# Altium PCB 新主控制.PcbDoc (part 1 of 3)
Units mil, origin at the board's own origin, x right, y up, seen from the top; angles counter-clockwise.
Board outline 9070 x 4900 mil, 2 copper layers (Top Layer, Bottom Layer); 275 components, 202 nets, 862 pads, 116 vias.
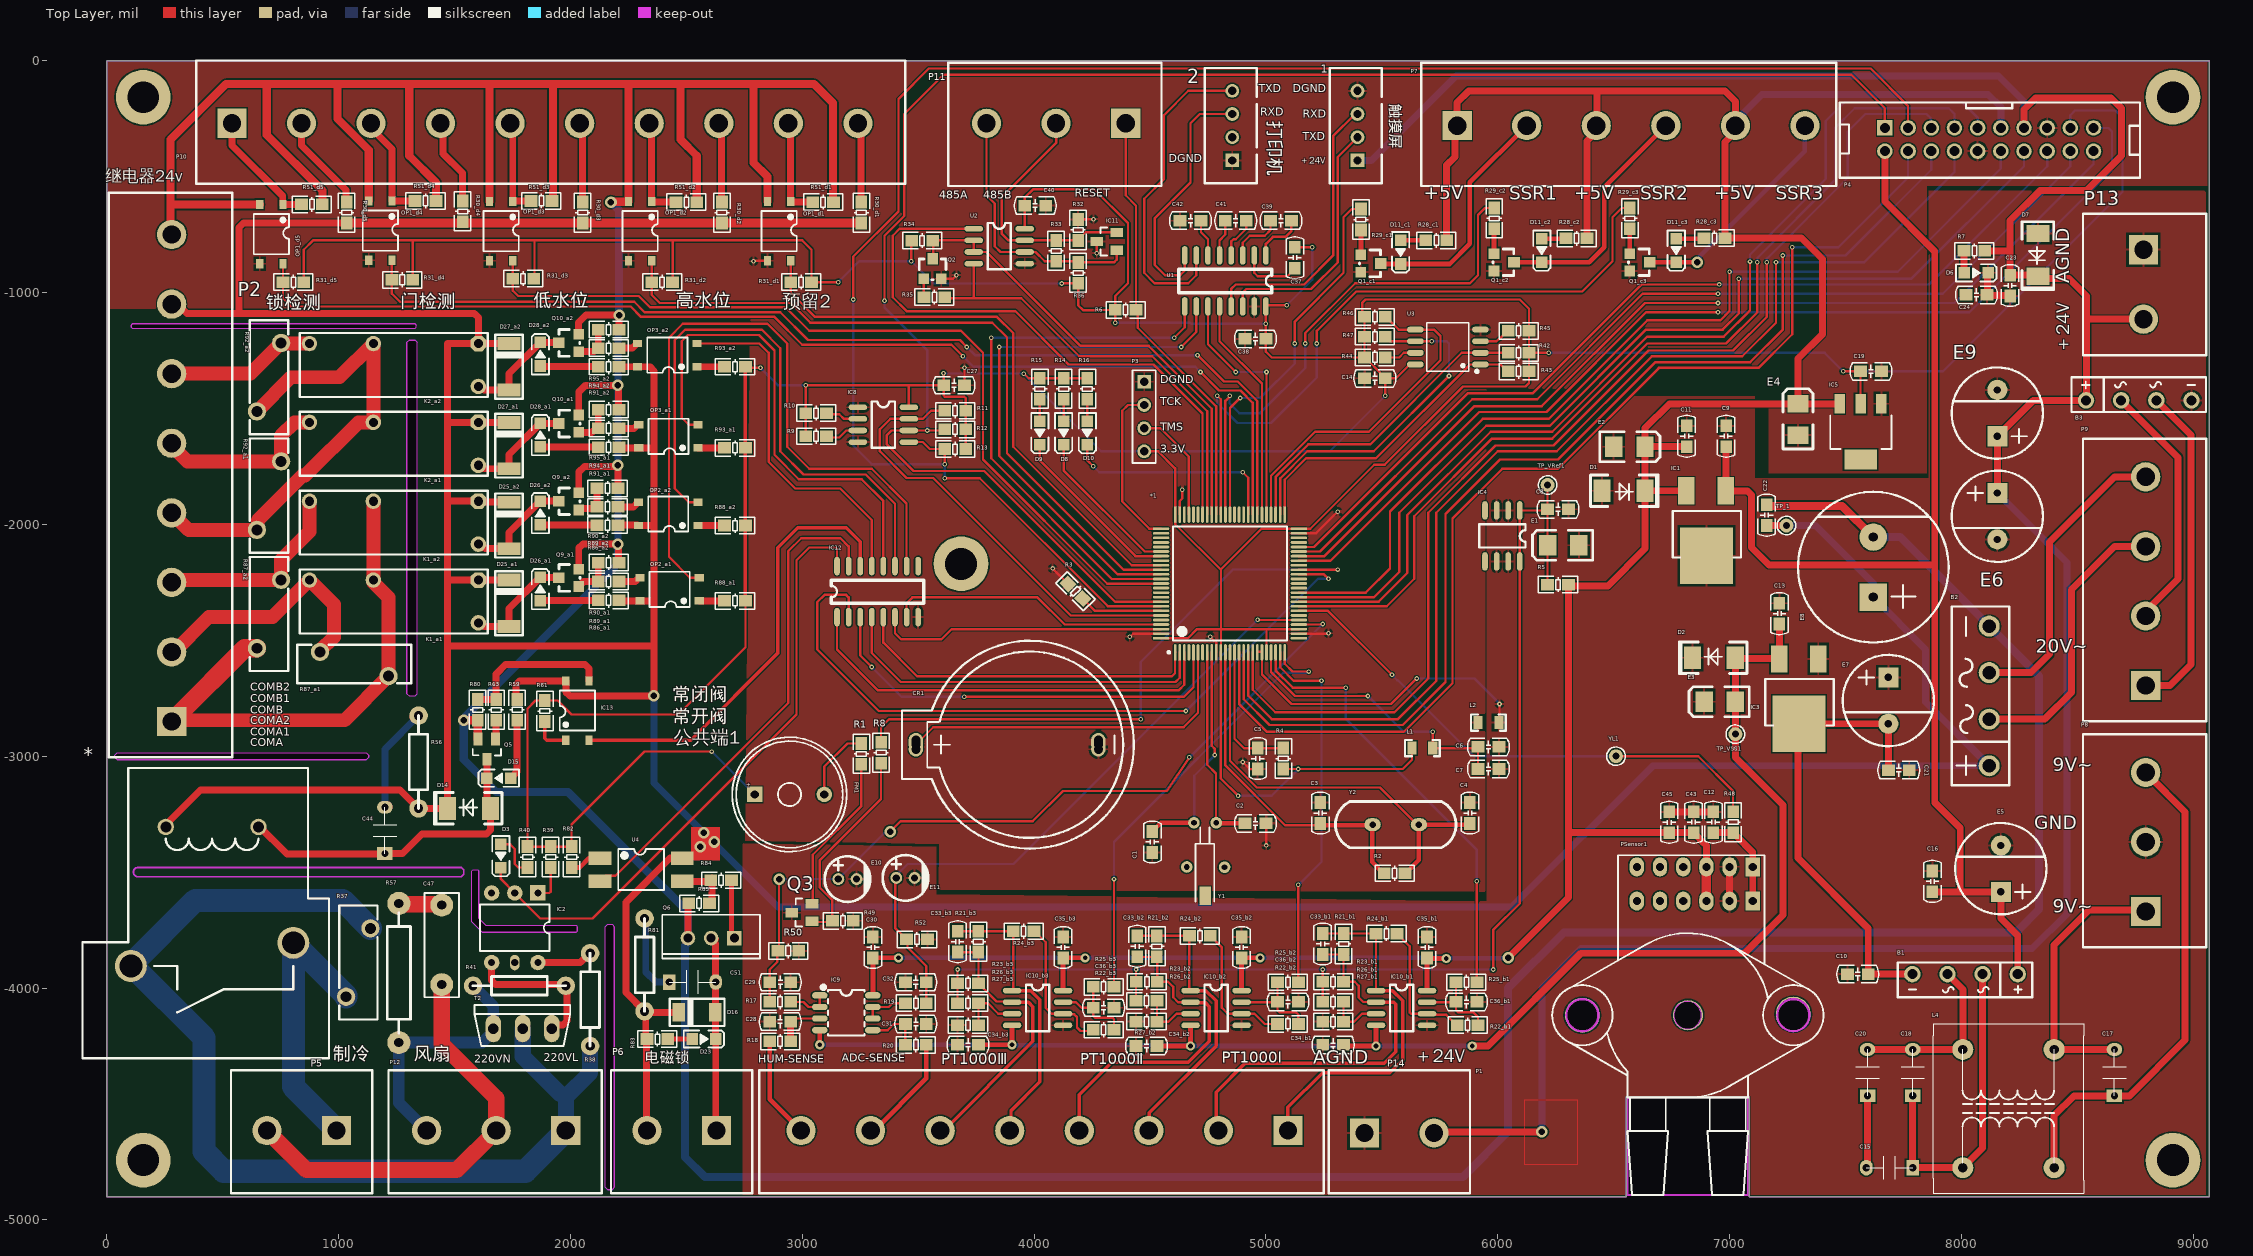
[diagram p0: Top Layer view]
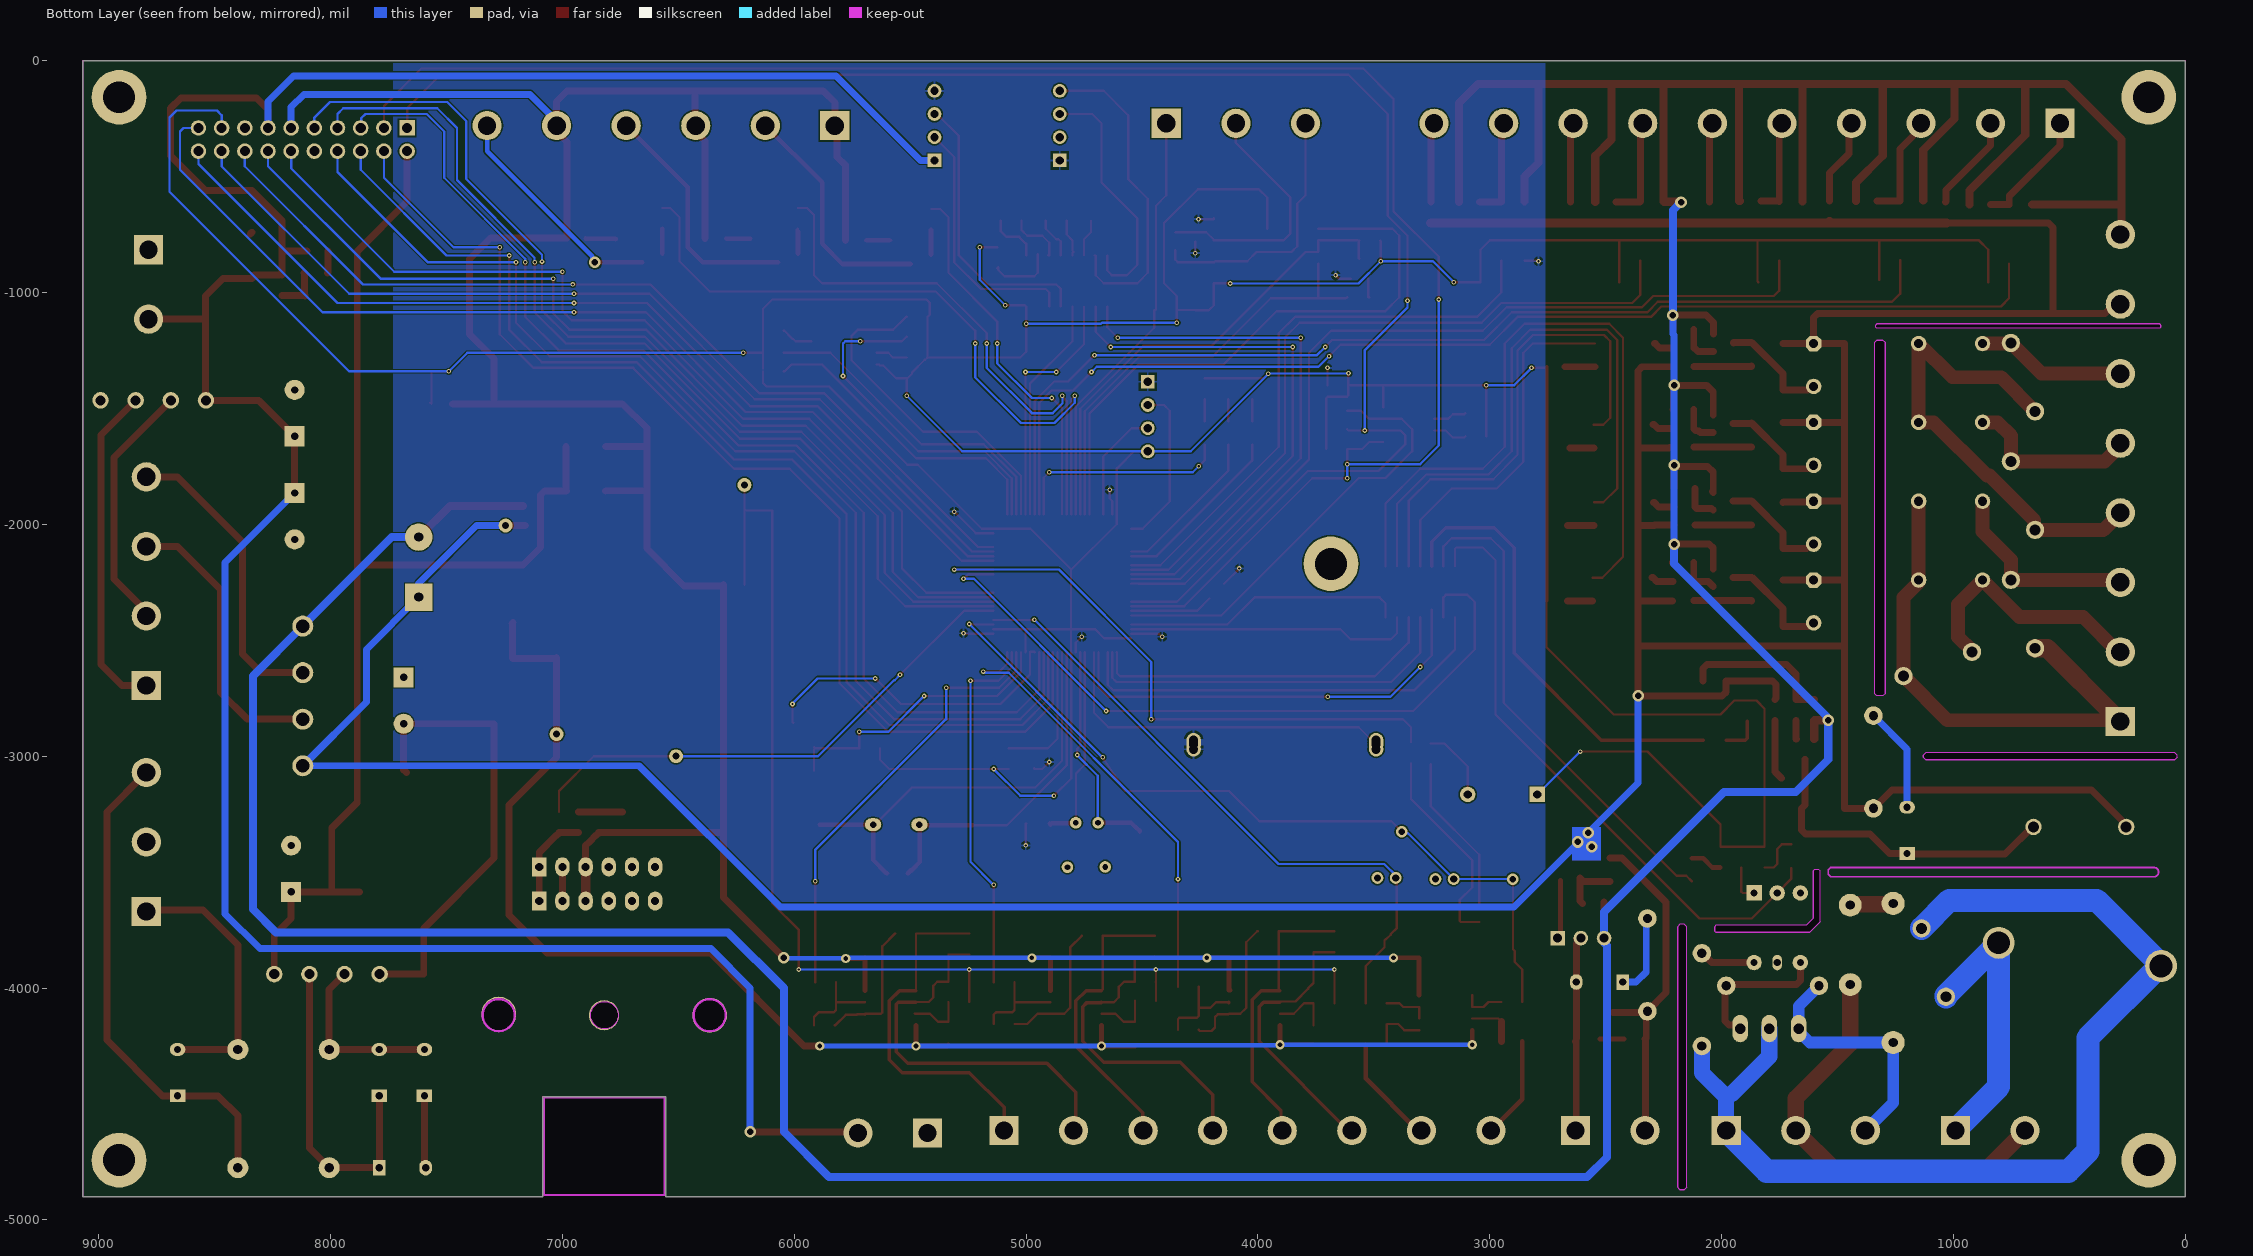
[diagram p1: Bottom Layer view, seen from below]

## Layer stack, top to bottom
Top Solder: solder mask 0.4, Solder Resist, Dk 3.5
Top Layer: signal copper 1.4
Dielectric 1: dielectric 12.6, FR-4, Dk 4.8
Bottom Layer: signal copper 1.4
Bottom Solder: solder mask 0.4, Solder Resist, Dk 3.5

## Board outline
0,-4900 0,0 9070,0 9070,-4900 7085,-4900 7085,-4470 6555,-4470 6555,-4900
cut-out: 1575,-3715 1575,-3495 1580,-3490 1600,-3490 1605,-3495 1605,-3700 1635,-3730 2025,-3730 2030,-3735 2030,-3755 2025,-3760 1620,-3760
cut-out: 35,-3005 35,-2995 45,-2985 1120,-2985 1130,-2995 1130,-3005 1120,-3015 45,-3015
cut-out: 105,-1150 110,-1155 1330,-1155 1335,-1150 1335,-1140 1330,-1135 110,-1135 105,-1140
cut-out: 2150,-4860 2150,-3735 2160,-3725 2180,-3725 2190,-3735 2190,-4860 2180,-4870 2160,-4870
cut-out: 1295,-2730 1305,-2740 1330,-2740 1340,-2730 1340,-1215 1330,-1205 1305,-1205 1295,-1215

## Design rules (kind name [scope] priority, off if disabled: settings)
Clearance [All] p1: gap=6 ignorepadtopadclearanceinfootprint=FALSE
ComponentClearance [All] p1: gap=0 collisioncheckmode=3 verticalgap=10 showdistances=FALSE
DiffPairsRouting [All] p1: maxlimit=10 minlimit=99999 mostfreqgap=10 toplayer_mingap=0 toplayer_minwidth=15 toplayer_maxwidth=15 toplayer_prefwidth=15 bottomlayer_mingap=0 bottomlayer_minwidth=15 bottomlayer_maxwidth=15 bottomlayer_prefwidth=15 maxuncoupledlength=500
HoleSize [All] p1: absolutevalues=TRUE maxlimit=500 minlimit=1 maxpercent=80.000 minpercent=20.000
HoleToHoleClearance [All] p1: gap=0 allowstackedmicrovias=TRUE
MinimumSolderMaskSliver [All] p1: minsoldermaskwidth=0
PasteMaskExpansion [All] p1: expansion=4
PolygonConnect [All] p1: connectstyle=Relief reliefconductorwidth=10 reliefentries=4 polygonreliefangle="90 Angle" airgapwidth=10
RoutingVias [All] p1: holewidth=10 width=2 viastyle="Through Hole" minholewidth=10 minwidth=20 maxholewidth=28 maxwidth=50
SilkToSilkClearance [All] p1: silktosilkclearance=0
SilkToSolderMaskClearance [IsPad] p1: minsilkscreentomaskgap=0 clearancetoexposedcopper=FALSE
SolderMaskExpansion [All] p1: expansion=0 istentingtop=FALSE
Width [All] p1: maxlimit=100 minlimit=10 preferedwidth=10
22 further rules are at their usual default settings.

## Classes and differential pairs
channel class "In_put ": d1 d2 d3 d4 d5
net class SI_B[1..5]: SI_B1 SI_B2 SI_B3 SI_B4 SI_B5
net class SI_A[1..5]: SI_A1 SI_A2 SI_A3 SI_A4 SI_A5
net class PT_B[1..3]: PT_B1 PT_B2 PT_B3
net class PT_A[1..3]: PT_A1 PT_A2 PT_A3
net class ADC[1..3]: ADC1 ADC2 ADC3
component class main: *1 C1 C2 P1 P3 P4 P7 P13 P14 Y1
component class Designator: C28 C29 C30 C31 C32 E10 E11 IC9 R17 R18 R19 R20 R50 R52
component class Designator5: 1 2 C37 C38 C39 C40 C41 C42 IC11 P11 Q2 R6 R32 R33 R34 R35 R36 U1 U2
component class Designator4: C27 IC8 R9 R10 R11 R12 R13
component class Designator3: D8 D9 D10 P10 R14 R15 R16
component class Designator2: C3 C4 C5 C6 C7 CR1 L1 L2 R2 R3 R4 Y2
component class Designator1: B1 B2 B3 C8 C9 C10 C11 C13 C15 C16 C17 C18 C19 C20 C21 C22 C23 C24 D1 D2 D6 D7 E1 E2 E3 E4 E5 E6 E7 E8 E9 IC1 IC3 IC4 IC5 L4 P8 P9 R5 R7 TP_1 TP_VRef1 TP_VSS1
component class d5: OP1_d5 R30_d5 R31_d5 R51_d5
component class d4: OP1_d4 R30_d4 R31_d4 R51_d4
component class d3: OP1_d3 R30_d3 R31_d3 R51_d3
component class d2: OP1_d2 R30_d2 R31_d2 R51_d2
component class d1: OP1_d1 R30_d1 R31_d1 R51_d1
component class c3: D11_c3 Q1_c3 R28_c3 R29_c3
component class c2: D11_c2 Q1_c2 R28_c2 R29_c2
component class c1: D11_c1 Q1_c1 R28_c1 R29_c1
component class b3: C33_b3 C34_b3 C35_b3 C36_b3 IC10_b3 R21_b3 R22_b3 R23_b3 R24_b3 R25_b3 R26_b3 R27_b3
component class b2: C33_b2 C34_b2 C35_b2 C36_b2 IC10_b2 R21_b2 R22_b2 R23_b2 R24_b2 R25_b2 R26_b2 R27_b2
component class b1: C33_b1 C34_b1 C35_b1 C36_b1 IC10_b1 R21_b1 R22_b1 R23_b1 R24_b1 R25_b1 R26_b1 R27_b1
component class a2: D25_a2 D26_a2 D27_a2 D28_a2 K1_a2 K2_a2 OP2_a2 OP3_a2 Q9_a2 Q10_a2 R86_a2 R87_a2 R88_a2 R89_a2 R90_a2 R91_a2 R92_a2 R93_a2 R94_a2 R95_a2
component class a1: D25_a1 D26_a1 D27_a1 D28_a1 K1_a1 K2_a1 OP2_a1 OP3_a1 Q9_a1 Q10_a1 R86_a1 R87_a1 R88_a1 R89_a1 R90_a1 R91_a1 R92_a1 R93_a1 R94_a1 R95_a1
channel class Ctrol1: a1 a2
channel class SSR_Ctrol: c1 c2 c3
channel class ADC&SSR: b1 b2 b3

## Components (designator, comment, footprint, x,y, rotation, side; value= is the part's Value field where it differs from the comment)
1 "Header 4" XH2.54-4P 5395,-430 r90 top
2 "Header 4" XH2.54-4P 4855,-430 r90 top
* "HF2150-1A-23DE" JIDIANQI 454.61,-3605 r180 top
*1 "Other" STM-LQFP100_N 4845,-2255 r90 top
B1 "KBP206" KBP206 8015.79,-3940 r180 top
B2 "KBL406" KPL406 8120,-2740 r90 top
B3 "KBP206" KBP206 8765,-1465 r0 top
C1 "10pF" 0805C 4510,-3415 r180 top
C2 "10pF" 0805C 5000,-3290 r270 top
C3 "20pF" 0805C 5235,-3290 r180 top
C4 "20pF" 0805C 5880,-3290 r180 top
C5 "0.1uF" 0805C 4965,-3055 r180 top
C6 "105" 0805C 6005,-2960 r270 top
C7 "103" 0805C 5915,-3055 r90 top
C8 "0.1uF" 0805C 6305,-1935 r270 top
C9 "2.2uF" 0805C 6985,-1665 r180 top value=104P
C10 "2.2uF" 0805C 7598.11,-3940 r270 top value=104P
C11 "0.1uF" 0805C 6815,-1665 r180 top value=104P
C12 "Cap" 0805C 6930,-3330 r180 top value=330pF
C13 "0.1uF" 0805C 7215,-2430 r180 top value=104P
C14 "0.1uF" 0805C 5515,-1370 r270 top
C15 "683P 100V 5mm" CP1 7790,-4775 r270 top
C16 "0.1uF" 0805C 7875,-3585 r180 top value=104P
C17 "4.7nf/100v" CP1 8660,-4465 r180 top value="472P 100V 5mm"
C18 "4.7nf/100v" CP1 7790,-4465 r180 top value=472P
C19 "104P" 0805C 7565,-1340 r90 top
C20 "683P 100V 5mm" CP1 7595,-4465 r180 top
C21 "0.1uF" 0805C 7775,-3060 r270 top
C22 "0.1uF" 0805C 7160,-2005 r180 top value=104P
C23 "0.1uF" 0805C 8210,-925 r0 top
C24 "0.33uF" 0805C 8020,-1010 r90 top
C27 "0.1uF" 0805C 3700,-1400 r270 top
C28 "0.1uF" 0805C 2950,-4145 r270 top
C29 "1uF" 0805C 2860,-3975 r90 top
C30 "0.1uF" 0805C 3305,-3780 r0 top
C31 "0.1uF" 0805C 3445,-4155 r90 top
C32 "1uF" 0805C 3535,-3975 r270 top
C33_b1 "0.1nF" 0805C 5245,-3765 r0 top (schematic designator C33)
C33_b2 "0.1nF" 0805C 4445,-3775 r0 top (schematic designator C33)
C33_b3 "0.1nF" 0805C 3670,-3755 r0 top (schematic designator C33)
C34_b1 "0.1uF" 0805C 5245,-4245 r90 top (schematic designator C34)
C34_b2 "0.1uF" 0805C 4440,-4250 r90 top (schematic designator C34)
C34_b3 "0.1uF" 0805C 3670,-4245 r90 top (schematic designator C34)
C35_b1 "0.1uF" 0805C 5695,-3780 r0 top (schematic designator C35)
C35_b2 "0.1uF" 0805C 4895,-3780 r0 top (schematic designator C35)
C35_b3 "0.1uF" 0805C 4125,-3780 r0 top (schematic designator C35)
C36_b1 "0.1uF" 0805C 5910,-4060 r270 top (schematic designator C36)
C36_b2 "0.1uF" 0805C 5140,-4060 r270 top (schematic designator C36)
C36_b3 "0.1uF" 0805C 4345,-4085 r270 top (schematic designator C36)
C37 "0.1uF" 0805C 5125,-895 r180 top
C38 "0.1uF" 0805C 4910,-1200 r90 top
C39 "0.1uF" 0805C 5020,-690 r90 top
C40 "0.1uF" 0805C 4050,-625 r270 top
C41 "0.1uF" 0805C 4915,-690 r270 top
C42 "0.1uF" 0805C 4720,-690 r270 top
C43 "Cap" 0805C 6845,-3330 r180 top value=103P
C44 "104P/100V" CP1 1200,-3420 r180 top
C45 "Cap" 0805C 6740,-3240 r0 top value=105P
C47 "101/250V" C6-7.62 1445,-3965 r180 top
C51 "Cap" CP1 2426.74,-3974.03 r90 top value="CBB 104 100V 5mm"
CR1 "BS-02-A1AJ010" BATT 4277.4,-2950.31 r90 top
D1 "1N4001" SK24 6635,-1855 r180 top
D2 "1N4001" SK24 6840,-2575 r0 top
D3 "LED0" 0805LED 1700,-3380 r90 top
D6 "LED0" 0805LED 8013,-915 r180 top
D7 "1N4001" SK24 8330,-930 r90 top
D8 "LED0" 0805LED 4127.5,-1555 r90 top
D9 "LED0" 0805LED 4025,-1555 r90 top
D10 "LED0" 0805LED 4230,-1555 r90 top
D11_c1 "LED0" 0805LED 5581.09,-774.98 r90 top (schematic designator D11)
D11_c2 "LED0" 0805LED 6190,-768 r90 top (schematic designator D11)
D11_c3 "LED0" 0805LED 6770,-768 r90 top (schematic designator D11)
D14 "M7" SK24 1470,-3225 r0 top
D15 "M7" 0805LED 1742,-3095 r0 top
D16 "M7" DO-214AC 2546.26,-4104.85 r0 top
D23 "LED0" 0805LED 2525,-4220 r180 top
D25_a1 "1N4007" DO-213AB 1735,-2340 r270 top (schematic designator D25)
D25_a2 "1N4007" DO-213AB 1735,-2005 r270 top (schematic designator D25)
D26_a1 "LED0" 0805LED 1870,-2330 r270 top (schematic designator D26)
D26_a2 "LED0" 0805LED 1870,-2002 r270 top (schematic designator D26)
D27_a1 "1N4007" DO-213AB 1735,-1660 r270 top (schematic designator D27)
D27_a2 "1N4007" DO-213AB 1735,-1320 r270 top (schematic designator D27)
D28_a1 "LED0" 0805LED 1870,-1665.67 r270 top (schematic designator D28)
D28_a2 "LED0" 0805LED 1870,-1317 r270 top (schematic designator D28)
E1 "10uf/16V" 3528 6215,-2090 r180 top
E2 "100uf/10v" 3528 6635,-1665 r0 top value=100uf/16V
E3 "100uf/10v" 3528 6890,-2765 r180 top value=100uf/16V
E4 "100uf/16V" 3528 7295,-1480 r90 top
E5 "1000uf/25V" EC5.08-10.5 8170,-3585 r180 top
E6 "470uf/50V" EC5.08-10.5 8155,-1865 r0 top value=1000uf/25V
E7 "1000uf/25V" EC5.08-10.5 7685,-2660 r0 top
E8 "2200uf/50V" EC5.08-13.5 7620,-2314.05 r180 top
E9 "470uf/50V" EC5.08-10.5 8155,-1620 r180 top value=1000uf/25V
E10 "1uf/25V" CAP-TH_BD5.0-P2.00-D0.8-FD 3195,-3530 r0 top value=1000uf/25V
E11 "1uf/25V" CAP-TH_BD5.0-P2.00-D0.8-FD 3445,-3525 r0 top value=1000uf/25V
FM1 "有源蜂鸣器" SPK 2795,-3165 r270 top value="3.3V 12*9.5"
IC1 "L7805CV" DPAK3 7014.17,-2257.05 r180 top
IC2 "MOC3083" DIP6 1860.35,-3590.24 r180 top
IC3 "L7905CV" DPAK3 7414.17,-2982.05 r180 top
IC4 "TL431" SO8 6095,-1940 r90 top
IC5 "SPX1117-3.3V" SOT223 7655,-1480 r180 top
IC8 "CAT24C32" SO8 3240,-1495 r180 top
IC9 "TL072IDR" LM2904M/TR 3190,-4106.58 r270 top
IC10_b1 "TL072IDR" SOP8 5476,-4009.88 r0 top (schematic designator IC10)
IC10_b2 "TL072IDR" SOP8 4676,-4009.88 r0 top (schematic designator IC10)
IC10_b3 "TL072IDR" SOP8 3906,-4009.88 r0 top (schematic designator IC10)
IC11 "CDSOT23-SM712" SOT23 4357,-817 r90 top
IC12 "ULN2003A" SO16 3150,-2400 r90 top
IC13 "" TLV-356 1980,-2930.91 r90 top
K1_a1 "G5NB-1A-E12DC" G5NB-1A-E 1602.76,-2240 r180 top (schematic designator K1)
K1_a2 "G5NB-1A-E12DC" G5NB-1A-E 1602.76,-1900 r180 top (schematic designator K1)
K2_a1 "G5NB-1A-E12DC" G5NB-1A-E 1602.76,-1560 r180 top (schematic designator K2)
K2_a2 "G5NB-1A-E12DC" G5NB-1A-E 1602.76,-1220 r180 top (schematic designator K2)
L1 "10uH" "L 0805" 5675,-2965 r0 top
L2 "10uH" "L 0805" 5960,-2855 r0 top
L4 "共模电感" TRANS 8400,-4265 r180 top
OP1_d1 "TLP781(GR-TP6,F)" TLV-356 2950,-607.06 r270 top (schematic designator OP1)
OP1_d2 "TLP781(GR-TP6,F)" TLV-356 2350.61,-607.06 r270 top (schematic designator OP1)
OP1_d3 "TLP781(GR-TP6,F)" TLV-356 1751.21,-607.06 r270 top (schematic designator OP1)
OP1_d4 "TLP781(GR-TP6,F)" TLV-356 1230,-605 r270 top (schematic designator OP1)
OP1_d5 "TLP781(GR-TP6,F)" TLV-356 760,-620 r270 top (schematic designator OP1)
OP2_a1 "TLP781(GR-TP6,F)" TLV-356 2555.91,-2330 r180 top (schematic designator OP2)
OP2_a2 "TLP781(GR-TP6,F)" TLV-356 2550,-2005 r180 top (schematic designator OP2)
OP3_a1 "TLP781(GR-TP6,F)" TLV-356 2550.91,-1670 r180 top (schematic designator OP3)
OP3_a2 "TLP781(GR-TP6,F)" TLV-356 2545.91,-1320 r180 top (schematic designator OP3)
P1 "Header 8" CONN-TH-KF7.62-8P 4045,-4615 r180 top
P2 "Header 8" CONN-TH-KF7.62-8P 280,-1800 r90 top
P3 "Header 4" HDR1X4 4475,-1385 r270 top
P4 "Header 10X2" HDR-TH_20P-P2.54_DC3-2.54-20PAS 8120,-340 r180 top
P5 "Header 2" 2P 841.32,-4615 r180 top
P6 "Header 2" 2P 2480,-4615 r180 top
P7 "Header 6" CONN-TH_6P-P7.62_WJ25C-B-7.62-6P 6575,-280 r0 top
P8 "Header 3" CONN-TH-KF7.62-3P 8795,-3370 r90 top
P9 "Header 4" CONN-TH_KF7.62-4P 8795,-2245 r90 top
P10 "Header 10" CONN-TH-KF7.62-10P 1890,-270 r0 top
P11 "Header 3" 3PPP 4095,-270 r180 top
P12 "Header 3" CONN-TH_KF7.62-3P 1680,-4615 r180 top
P13 "Header 2" 2P 8785,-965 r270 top
P14 "Header 2" 2PPPPP 5575,-4625 r0 top
PSensor1 "MPX5700AP" MPX5700AP 7100,-3477.13 r0 top
Q1_c1 "2N3904S-RTK/PS" SOT-23 5409.44,-836.76 r270 top (schematic designator Q1)
Q1_c2 "2N3904S-RTK/PS" SOT-23 5984.44,-831.76 r270 top (schematic designator Q1)
Q1_c3 "2N3904S-RTK/PS" SOT-23 6569.44,-831.76 r270 top (schematic designator Q1)
Q2 "2N3904S-RTK/PS" SOT-23 3524.54,-939.79 r0 top
Q3 "SS8550" SOT23 3042,-3712 r90 top
Q5 "S8050" SOT23 1677,-2926.06 r180 top
Q6 "TIP122" TO-220-AB 2607.14,-3784.46 r180 top
Q9_a1 "2N3904" SOT-23 2035.56,-2268.24 r90 top (schematic designator Q9)
Q9_a2 "2N3904" SOT-23 2035.56,-1938.24 r90 top (schematic designator Q9)
Q10_a1 "2N3904" SOT-23 2035.56,-1603.24 r90 top (schematic designator Q10)
Q10_a2 "2N3904" SOT-23 2035,-1255 r90 top (schematic designator Q10)
R1 "Res2" 0805R 3255,-3035 r180 top value=10K
R2 "1M" 0805R 5510,-3505 r90 top
R3 "100k" 0805R 4146.36,-2256.36 r45 top
R4 "10K" 0805R 5075,-2965 r0 top
R5 "220R" 0805R 6215,-2260 r90 top
R6 "10K" 0805R 4350,-1075 r90 top
R7 "10K" 0805R 8010.9,-820 r90 top
R8 "Res2" 0805R 3340,-3030 r180 top value=10K
R9 "10K" 0805R 3015,-1620 r90 top
R10 "10K" 0805R 3015,-1520 r90 top
R11 "10K" 0805R 3705,-1510 r270 top
R12 "10K" 0805R 3705,-1590 r270 top
R13 "10K" 0805R 3705,-1675 r270 top
R14 "300/0.125W" 0805R 4127.5,-1370 r0 top
R15 "300/0.125W" 0805R 4025,-1370 r0 top
R16 "300/0.125W" 0805R 4230,-1370 r0 top
R17 "1K" 0805R 2950,-4060 r270 top
R18 "1K" 0805R 2950,-4230 r270 top
R19 "1K" 0805R 3445,-4065 r90 top
R20 "1K" 0805R 3445,-4245 r90 top
R21_b1 "10M" 0805R 5335,-3765 r0 top (schematic designator R21)
R21_b2 "10M" 0805R 4530,-3775 r0 top (schematic designator R21)
R21_b3 "10M" 0805R 3760,-3755 r0 top (schematic designator R21)
R22_b1 "13k(0.1%)" 0805R 5825,-4160 r90 top (schematic designator R22)
R22_b2 "13k(0.1%)" 0805R 5050,-4155 r90 top (schematic designator R22)
R22_b3 "13k(0.1%)" 0805R 4255,-4180 r90 top (schematic designator R22)
R23_b1 "1k" 0805R 5245,-3972.88 r90 top value=1k(0.1%) (schematic designator R23)
R23_b2 "1k" 0805R 4440.9,-3972.88 r90 top value=1k(0.1%) (schematic designator R23)
R23_b3 "1k" 0805R 3670,-3980 r90 top value=1k(0.1%) (schematic designator R23)
R24_b1 "4.7k" 0805R 5475,-3765 r90 top value=4.7k(0.1%) (schematic designator R24)
R24_b2 "4.7k" 0805R 4670,-3775 r90 top value=4.7k(0.1%) (schematic designator R24)
R24_b3 "4.7k" 0805R 3910,-3755 r90 top value=4.7k(0.1%) (schematic designator R24)
R25_b1 "4.7K" 0805R 5820,-3975 r90 top (schematic designator R25)
R25_b2 "4.7K" 0805R 5050,-3975 r90 top (schematic designator R25)
R25_b3 "4.7K" 0805R 4255,-3995 r90 top (schematic designator R25)
R26_b1 "1k" 0805R 5245,-4060 r90 top value=1k(0.1%) (schematic designator R26)
R26_b2 "1k" 0805R 4440,-4055 r90 top value=1k(0.1%) (schematic designator R26)
R26_b3 "1k" 0805R 3670,-4065 r90 top value=1k(0.1%) (schematic designator R26)
R27_b1 "1k" 0805R 5335,-4145 r270 top value=1k(0.1%) (schematic designator R27)
R27_b2 "1k" 0805R 4530,-4145 r270 top value=1k(0.1%) (schematic designator R27)
R27_b3 "1k" 0805R 3760,-4160 r270 top value=1k(0.1%) (schematic designator R27)
R28_c1 "10K" 0805R 5689.9,-774.98 r90 top (schematic designator R28)
R28_c2 "10K" 0805R 6295,-766.39 r90 top (schematic designator R28)
R28_c3 "10K" 0805R 6890,-765 r90 top (schematic designator R28)
R29_c1 "1K" 0805R 5410,-640 r0 top (schematic designator R29)
R29_c2 "1K" 0805R 5985,-635 r0 top (schematic designator R29)
R29_c3 "1K" 0805R 6570,-635 r0 top (schematic designator R29)
R30_d1 "4.7K" 0805R 3255,-700 r180 top (schematic designator R30)
R30_d2 "4.7K" 0805R 2653.75,-700 r180 top (schematic designator R30)
R30_d3 "4.7K" 0805R 2052.5,-700 r180 top (schematic designator R30)
R30_d4 "4.7K" 0805R 1535,-695 r180 top (schematic designator R30)
R30_d5 "4.7K" 0805R 1035,-700 r180 top (schematic designator R30)
R31_d1 "10K" 0805R 3040,-955 r270 top (schematic designator R31)
R31_d2 "10K" 0805R 2440.81,-955 r270 top (schematic designator R31)
R31_d3 "10K" 0805R 1841.63,-940 r270 top (schematic designator R31)
R31_d4 "10K" 0805R 1320,-945 r270 top (schematic designator R31)
R31_d5 "10K" 0805R 850,-955 r270 top (schematic designator R31)
R32 "10K" 0805R 4190,-685 r0 top
R33 "1K" 0805R 4095,-775 r0 top
R34 "10K" 0805R 3562.78,-776.08 r270 top
R35 "10K" 0805R 3615,-1020 r270 top
R36 "10K" 0805R 4190,-870 r0 top
R37 "RM10D471KD14E100" YAMINGDIANZU 1085,-3890 r90 top
R38 "360R" AXIAL0.4 2085,-4250 r90 top
R39 "220" 0805R 1915,-3390 r0 top
R40 "3.3K" 0805R 1815,-3480 r180 top
R41 "330" AXIAL0.4 1980,-3990 r180 top
R42 "4.7K" 0805R 6045,-1260 r90 top
R43 "4.7K" 0805R 6045,-1340 r90 top
R44 "4.7K" 0805R 5425,-1280 r90 top
R45 "4.7K" 0805R 6135,-1165 r270 top
R46 "4.7K" 0805R 5425,-1105 r90 top
R47 "4.7K" 0805R 5515,-1190 r270 top
R48 "RES2" 0805R 7015,-3330 r180 top value=1K
R49 "Res2" 0805R 3130,-3710 r90 top value=10K
R50 "1.5K" 0805R 2985,-3840 r270 top
R51_d1 "150R" 0805R 3045,-610 r90 top (schematic designator R51)
R51_d2 "150R" 0805R 2455,-610 r90 top (schematic designator R51)
R51_d3 "150R" 0805R 1830,-605 r90 top (schematic designator R51)
R51_d4 "150R" 0805R 1330,-605 r90 top (schematic designator R51)
R51_d5 "150R" 0805R 840,-620 r90 top (schematic designator R51)
R52 "1.5K" 0805R 3540,-3790 r270 top
R56 "10K" AXIAL0.4 1345,-2825 r270 top
R57 "20/2W" AXIAL0.6 1260.44,-3634.76 r270 top
R59 "10K" 0805R 1770,-2845 r180 top
R61 "220" 0805R 1890,-2760 r0 top
R63 "10K" 0805R 1680,-2755 r0 top
R80 "10K" 0805R 1600,-2755 r0 top
R81 "Res2" AXIAL0.4 2320,-3700 r270 top value=10K
R82 "Res2" 0805R 2005,-3390 r0 top value=220R
R83 "Res2" 0805R 2330,-4220 r90 top value=100K
R84 "Res2" 0805R 2695,-3535 r270 top value=10K
R85 "Res2" 0805R 2600,-3635 r270 top value=10K
R86_a1 "4.7K" 0805R 2210,-2327.95 r270 top value=10K (schematic designator R86)
R86_a2 "4.7K" 0805R 2205,-2003.61 r270 top value=10K (schematic designator R86)
R87_a1 "RM10D471KD14E100" YAMINGDIANZU 1067.64,-2602.36 r0 top (schematic designator R87)
R87_a2 "RM10D471KD14E100" YAMINGDIANZU 700,-2386.76 r270 top (schematic designator R87)
R88_a1 "220R" 0805R 2755,-2330 r270 top (schematic designator R88)
R88_a2 "220R" 0805R 2755,-2005 r270 top (schematic designator R88)
R89_a1 "4.7K" 0805R 2210,-2246.47 r270 top (schematic designator R89)
R89_a2 "4.7K" 0805R 2205,-1924.31 r270 top (schematic designator R89)
R90_a1 "4.7K" 0805R 2210,-2165 r270 top (schematic designator R90)
R90_a2 "4.7K" 0805R 2205,-1845 r270 top (schematic designator R90)
R91_a1 "4.7K" 0805R 2210,-1667.28 r270 top value=10K (schematic designator R91)
R91_a2 "4.7K" 0805R 2210,-1320 r270 top value=10K (schematic designator R91)
R92_a1 "RM10D471KD14E100" YAMINGDIANZU 700,-1875.88 r270 top (schematic designator R92)
R92_a2 "RM10D471KD14E100" YAMINGDIANZU 700,-1365 r270 top (schematic designator R92)
R93_a1 "220R" 0805R 2755,-1670 r270 top (schematic designator R93)
R93_a2 "220R" 0805R 2755,-1320 r270 top (schematic designator R93)
R94_a1 "4.7K" 0805R 2210,-1586.14 r270 top (schematic designator R94)
R94_a2 "4.7K" 0805R 2210,-1240 r270 top (schematic designator R94)
R95_a1 "4.7K" 0805R 2210,-1505 r270 top (schematic designator R95)
R95_a2 "4.7K" 0805R 2210,-1160 r270 top (schematic designator R95)
T2 "BT139" TO220E 1793.76,-4174.56 r0 top
TP_1 "" TPP 7245,-2005 r90 top
TP_VRef1 "" TPP 6215,-1830 r180 top
TP_VSS1 "" TPP 7025,-2905 r90 top
U1 "MAX3232" SO16 5000,-840 r270 top
U2 "MAX3485EESA" SOP8 3741,-724 r0 top
U3 "w25q64" W25Q64 5785,-1235 r90 top
U4 "TLP781" suo 2305,-3490 r0 top
Y1 "32.768" XTAL6 4785.66,-3287.37 r180 top
Y2 "8M" XTAL3 5460,-3295 r0 top
YL1 "" TPP 6510,-3000 r0 top

## Footprints (in the part's own frame and the unit in brackets; to place one, negate y for a bottom-side part, rotate by r counter-clockwise, add the part's x,y. Pads: shape width x height; smd on the part's side, far side on the other; paste and mask are expansions set on the pad)
2P [mm]
  rect 3.21x3.2 hole 2 paste+0 mask+0.051: 1(-3.81,0)
  round 3.2 hole 2 paste+0 mask+0.051: 2(3.81,0)
  silkscreen extent -7.73,-6.62 7.75,6.88
2PPPPP [mm]
  rect 3.21x3.2 hole 2 paste+0 mask+0.051: 1(-3.81,0)
  round 3.2 hole 2 paste+0 mask+0.051: 2(3.81,0)
  silkscreen extent -7.73,-6.62 7.75,6.88
3PPP [mm]
  rect 3.21x3.2 hole 2 paste+0 mask+0.051: 1(-7.62,0)
  round 3.2 hole 2 paste+0 mask+0.051: 2(0,0) 3(7.62,0)
  silkscreen extent -11.54,-6.62 11.81,6.88
0805C [mm]
  rect 1.27x1.4 smd: 1(0,0) 2(0,-2.286)
  silkscreen extent -0.95,-3.43 0.95,1.15
0805LED [mil]
  rect 50x50 smd: 1(0,0) 2(-102,0)
  silkscreen extent -138,-37 36,37
0805R [mm]
  rect 1.27x1.4 smd: 1(0,0) 2(0,-2.286)
  silkscreen extent -0.9,-3.29 0.9,1
3528 [mil]
  rect 75x90 smd: 1(0,0) 2(-135,0)
  silkscreen extent -195,-65 65,65
AXIAL0.4 [mil]
  round 80 hole 40: 1(0,0) 2(400,0)
  silkscreen extent 0,-40 400,40
AXIAL0.6 [mil]
  round 100 hole 40: 1(0.24,-0.44) 2(600.24,-0.44)
  silkscreen extent 40,-50 560,50
BATT [mm]
  round 1.6 hole 1: 1(-0.5,20) 1(0,20) 1(0.25,20) 1(0.5,20) 2(-0.5,0) 2(0,0) 2(0,0) 2(0.25,0) 2(0.5,0)
  silkscreen extent -11.39,-3.88 11.39,21.5
C6-7.62 [mm]
  round 2.5 hole 1: 1(0,0.51) 2(0,-8.19)
  silkscreen extent -1.91,-9.52 1.91,1.91
CAP-TH_BD5.0-P2.00-D0.8-FD [mm]
  round 1.3 hole 0.8: 1(-1,0) 2(1,0)
  silkscreen extent -2.5,-2.5 2.5,2.5
CONN-TH-KF7.62-3P [mm]
  rect 3.21x3.2 hole 2 paste+0 mask+0.051: 1(-7.62,0)
  round 3.2 hole 2 paste+0 mask+0.051: 2(0,0) 3(7.62,0)
  silkscreen extent -11.54,-6.62 11.81,6.88
CONN-TH-KF7.62-8P [mm]
  rect 3.21x3.2 hole 2 paste+0 mask+0.051: 1(-26.67,0)
  round 3.2 hole 2 paste+0 mask+0.051: 2(-19.05,0) 3(-11.43,0) 4(-3.81,0) 5(3.81,0) 6(11.43,0) 7(19.05,0) 8(26.67,0)
  silkscreen extent -30.59,-6.62 31.24,6.88
CONN-TH-KF7.62-10P [mm]
  rect 3.21x3.2 hole 2 paste+0 mask+0.051: 1(-34.29,0)
  round 3.2 hole 2 paste+0 mask+0.051: 2(-26.67,0) 3(-19.05,0) 4(-11.43,0) 5(-3.81,0) 6(3.81,0) 7(11.43,0) 8(19.05,0) 9(26.67,0) 10(34.29,0)
  silkscreen extent -38.21,-6.62 39.49,6.88
CONN-TH_6P-P7.62_WJ25C-B-7.62-6P [mm]
  rect 3.21x3.2 hole 2 paste+0 mask+0.051: 1(-19.05,0)
  round 3.2 hole 2 paste+0 mask+0.051: 2(-11.43,0) 3(-3.81,0) 4(3.81,0) 5(11.43,0) 6(19.05,0)
  silkscreen extent -22.97,-6.62 22.48,6.88
CONN-TH_KF7.62-3P [mm]
  rect 3.21x3.2 hole 2 paste+0 mask+0.051: 1(-7.62,0)
  round 3.2 hole 2 paste+0 mask+0.051: 2(0,0) 3(7.62,0)
  silkscreen extent -11.54,-6.62 11.81,6.88
CONN-TH_KF7.62-4P [mm]
  rect 3.21x3.2 hole 2 paste+0 mask+0.051: 1(-11.43,0)
  round 3.2 hole 2 paste+0 mask+0.051: 2(-3.81,0) 3(3.81,0) 4(11.43,0)
  silkscreen extent -15.35,-6.62 15.62,6.88
CP1 [mm]
  rect 1.7x1.397 hole 0.8: 1(0,0)
  oval 1.7x1.397 hole 0.8: 2(0,-5.08)
  silkscreen extent -1.27,-5.08 1.27,0
DIP6 [mm]
  rect 1.7x1.7 hole 0.8: 1(0.009,-0.006)
  round 1.7 hole 0.8: 2(2.549,-0.006) 3(5.089,-0.006) 4(5.089,7.614) 6(0.009,7.614)
  oval 1.016x1.7 hole 0.8: 5(2.549,7.614)
  silkscreen extent -1.26,1.26 6.36,6.34
DO-213AB [mm]
  rect 1.4x2.5 smd: 1(2.54,0) 2(-2.54,0)
  Top Overlay keep-out lines w0.254: -1.016,-1.5 -1.016,1.5 ; -1.524,-1.5 -1.524,1.5 ; 3.5,-1.5 -3.5,-1.5 -3.5,1.5 3.5,1.5 3.5,-1.5
  silkscreen extent -3.5,-1.5 3.5,1.5
DO-214AC [mm]
  rect 1.4x2 smd: 1(2,0) 2(-2,0)
  Top Overlay keep-out lines w0.254: -3,-1.5 -3,1.5 3,1.5 3,-1.5 -3,-1.5 ; -0.508,-1.476 -0.508,1.524 -0.508,-1.476
  silkscreen extent -3,-1.5 3,1.52
DPAK3 [mm]
  rect 1.8x3 smd: 1(0.8,-10.2) 3(5.1,-10.2)
  rect 5.8x6.2 smd: 2(2.9,-3.1)
  silkscreen extent -0.9,-8 6.6,-2.9
EC5.08-10.5 [mm]
  rect 2.2x2.2 hole 0.8: 1(0,0)
  round 2.2 hole 0.8: 2(0,-5.08)
  silkscreen extent -5,-7.54 5,2.46
EC5.08-13.5 [mm]
  rect 3x3 hole 1: 1(0,0)
  round 3 hole 1: 2(0,-6.58)
  silkscreen extent -8.25,-11.54 8.25,4.96
G5NB-1A-E [mm]
  oct 1.7x1.7 hole 1: 1(0,0)
  round 1.7 hole 1: 2(11.5,0) 3(18.5,0) 4(0,4.7)
  silkscreen extent -1.05,-1.15 19.55,5.85
HDR1X4 [mm]
  rect 1.5x1.5 hole 0.9: 1(0,0)
  round 1.5 hole 0.9: 2(2.54,0) 3(5.08,0) 4(7.62,0)
  silkscreen extent -1.27,-1.27 8.89,1.27
HDR-TH_20P-P2.54_DC3-2.54-20PAS [mm]
  rect 1.7x1.7 hole 1.1 paste+0 mask+0.051: 1(11.43,-1.27)
  round 1.7 hole 1.1 paste+0 mask+0.051: 2(11.43,1.27) 3(8.89,-1.27) 4(8.89,1.27) 5(6.35,-1.27) 6(6.35,1.27) 7(3.81,-1.27) 8(3.81,1.27) 9(1.27,-1.27) 10(1.27,1.27) 11(-1.27,-1.27) 12(-1.27,1.27) 13(-3.81,-1.27) 14(-3.81,1.27) 15(-6.35,-1.27) 16(-6.35,1.27) 17(-8.89,-1.27) 18(-8.89,1.27) 19(-11.43,-1.27) 20(-11.43,1.27)
  silkscreen extent -16.51,-4.06 16.38,4.19
JIDIANQI [mm]
  round 1.8 hole 1.2: 1(-5.08,-7.62) 2(5.08,-7.62)
  round 3.5 hole 2.5: 3(8.9,7.62) 4(-8.9,5.08)
  silkscreen extent -12.8,-14.08 14.2,17.72
KBP206 [mm]
  round 1.8 hole 1.1 paste+0 mask+0.051: 1(-5.775,0) 2(-1.925,0) 3(1.925,0) 4(5.775,0)
  silkscreen extent -7.37,-1.27 7.38,2.53
KPL406 [mm]
  round 2.3 hole 1.5 paste+0 mask+0.051: 1(-7.65,0) 2(-2.55,0) 3(2.55,0) 4(7.65,0)
  silkscreen extent -9.8,-2.2 9.8,4.1
"L 0805" [mil] "小功率贴片电感        淘宝ID:黄晶"
  rect 40x55 smd: 1(-45,0) 2(45,0)
  silkscreen extent -75,-35 75,35, body extent -39,-24 39,24, height 35
LM2904M/TR [mm]
  oval 0.7x1.7 smd paste+0 mask+0.051: 1(-1.905,-2.9) 2(-0.635,-2.9) 3(0.635,-2.9) 4(1.905,-2.9) 5(1.905,2.9) 6(0.635,2.9) 7(-0.635,2.9) 8(-1.905,2.9)
  silkscreen extent -2.99,-2.71 2.5,2
MPX5700AP [mil]
  rect 62x82 hole 35: 1(0,-147.87) 1(0,0)
  oval 62x82 hole 35: 2(-100,-147.87) 2(-100,0) 3(-200,-147.87) 3(-200,0) 4(-300,-147.87) 4(-300,0) 5(-400,-147.87) 5(-400,0) 6(-500,-147.87) 6(-500,0)
  round 150 hole 140: ""(-735,-640) ""(175,-635)
  round 130 hole 120: ""(-280,-640)
  Keep-Out Layer circle w5: c-735.18,-639.95 r68.89
  Keep-Out Layer circle w5: c175.06,-640.19 r68.9
  Keep-Out Layer circle w5: c-281.64,-640.19 r59.05
  Keep-Out Layer circle w10: c175,-640 r68.9
  Keep-Out Layer circle w10: c-735,-640 r68.9
  Keep-Out Layer lines w8: -540,-1415 -540,-995 -20,-995 -20,-1415 -540,-1415
  silkscreen extent -865,-1415 305,50
SK24 [mm]
  rect 1.9x2.5 smd: 1(4.699,0) 2(0,0)
  silkscreen extent -1.45,-1.73 5.97,1.73
SO8 [mil]
  oval 80x24 smd: 1(0,0) 2(0,50) 3(0,100) 4(0,150) 5(-220,150) 6(-220,100) 7(-220,50) 8(-220,0)
  silkscreen extent -160,-25 -60,175
SO16 [mil]
  oval 80x24 smd: 1(0,0) 2(0,-50) 3(0,-100) 4(0,-150) 5(0,-200) 6(0,-250) 7(0,-300) 8(0,-350) 9(220,-350) 10(220,-300) 11(220,-250) 12(220,-200) 13(220,-150) 14(220,-100) 15(220,-50) 16(220,0)
  silkscreen extent 60,-375 160,25
SOP8 [mil]
  oval 80x24 smd: 1(-1,-1) 2(-1,-51) 3(-1,-101) 4(-1,-151) 5(219,-151) 6(219,-101) 7(219,-51) 8(219,-1)
  silkscreen extent 59,-176 159,24, body extent -4,-174 234,24, height 63
SOT23 [mil]
  rect 40x55 smd: 1(0,0) 2(76,0) 3(37,87)
  silkscreen extent -23,42 98,71
SOT223 [mil]
  rect 45x85 smd: 1(0,0) 2(90,0) 3(180,0)
  rect 140x85 smd: 4(90,240)
  silkscreen extent -43,50 221,195
SOT-23 [mil]
  rect 46x46 smd: 1(0.24,-0.44) 2(75.24,-0.44)
  rect 46x50 smd: 3(38.24,85.56)
  silkscreen extent -20,-5 95,85
SPK [mm]
  round 1.7 hole 0.889: 1(0,7.62)
  rect 1.7x1.7 hole 0.889: 2(0,0)
  silkscreen extent -6.27,-2.46 6.27,10.08
STM-LQFP100_N [mm] "Thin QFP, 100-Leads, Body 14x14mm, Pitch 0.5mm, IPC Medium Density"
  oval 1.8x0.3 smd: 1(-7.55,6) 2(-7.55,5.5) 3(-7.55,5) 4(-7.55,4.5) 5(-7.55,4) 6(-7.55,3.5) 7(-7.55,3) 8(-7.55,2.5) 9(-7.55,2) 10(-7.55,1.5) 11(-7.55,1) 12(-7.55,0.5) 13(-7.55,0) 14(-7.55,-0.5) 15(-7.55,-1) 16(-7.55,-1.5) 17(-7.55,-2) 18(-7.55,-2.5) 19(-7.55,-3) 20(-7.55,-3.5) 21(-7.55,-4) 22(-7.55,-4.5) 23(-7.55,-5) 24(-7.55,-5.5) 25(-7.55,-6) 51(7.55,-6) 52(7.55,-5.5) 53(7.55,-5) 54(7.55,-4.5) 55(7.55,-4) 56(7.55,-3.5) 57(7.55,-3) 58(7.55,-2.5) 59(7.55,-2) 60(7.55,-1.5) 61(7.55,-1) 62(7.55,-0.5) 63(7.55,0) 64(7.55,0.5) 65(7.55,1) 66(7.55,1.5) 67(7.55,2) 68(7.55,2.5) 69(7.55,3) 70(7.55,3.5) 71(7.55,4) 72(7.55,4.5) 73(7.55,5) 74(7.55,5.5) 75(7.55,6)
  oval 0.3x1.8 smd: 26(-6,-7.55) 27(-5.5,-7.55) 28(-5,-7.55) 29(-4.5,-7.55) 30(-4,-7.55) 31(-3.5,-7.55) 32(-3,-7.55) 33(-2.5,-7.55) 34(-2,-7.55) 35(-1.5,-7.55) 36(-1,-7.55) 37(-0.5,-7.55) 38(0,-7.55) 39(0.5,-7.55) 40(1,-7.55) 41(1.5,-7.55) 42(2,-7.55) 43(2.5,-7.55) 44(3,-7.55) 45(3.5,-7.55) 46(4,-7.55) 47(4.5,-7.55) 48(5,-7.55) 49(5.5,-7.55) 50(6,-7.55) 76(6,7.55) 77(5.5,7.55) 78(5,7.55) 79(4.5,7.55) 80(4,7.55) 81(3.5,7.55) 82(3,7.55) 83(2.5,7.55) 84(2,7.55) 85(1.5,7.55) 86(1,7.55) 87(0.5,7.55) 88(0,7.55) 89(-0.5,7.55) 90(-1,7.55) 91(-1.5,7.55) 92(-2,7.55) 93(-2.5,7.55) 94(-3,7.55) 95(-3.5,7.55) 96(-4,7.55) 97(-4.5,7.55) 98(-5,7.55) 99(-5.5,7.55) 100(-6,7.55)
  silkscreen extent -7.67,-6.25 6.25,6.82, body extent -7,-7 7,7, height 1.6
suo [mm]
  rect 2.5x1.5 smd: 1(-4.5,1.27) 2(-4.5,-1.27) 3(4.5,-1.27) 4(4.5,1.27)
  silkscreen extent -2.5,-2.23 2.5,2.27, body extent -5.02,-2.3 5.14,2.3, height 3.75
TLV-356 [mm]
  rect 1x0.8 smd: 1(0,0) 2(0,-2.54) 3(6.5,-2.54) 4(6.5,0)
  silkscreen extent 1.05,-3.19 5.45,0.67
TO220E [mil]
  oval 67x118 hole 45: 1(-125.76,-0.44) 2(0.24,-0.44) 3(126.24,-0.44)
  silkscreen extent -208,-76 206,102
TO-220-AB [mm] "TO, Thru-Hole, Vertical, Heatsink Mounted; 3 In-Line Leads; Pitch 2.54 mm"
  rect 1.6x1.6 hole 1: 1(-2.54,0)
  round 1.6 hole 1: 2(0,0) 3(2.54,0)
  silkscreen extent -5.35,-2.55 5.35,2.25
TPP [mil]
  round 60 hole 30: 1(0,0)
  silkscreen extent -40,-40 40,40
TRANS [mil]
  round 90.55 hole 40: 1(0,0) 2(0,510) 3(394,0) 4(394,510)
  silkscreen extent -128,-110 522,620
W25Q64 [mm]
  oval 0.65x1.822 smd mask+0.102: 1(-1.905,-3.566) 2(-0.635,-3.556) 3(0.635,-3.566) 4(1.905,-3.566) 5(1.905,3.566) 6(0.635,3.566) 7(-0.635,3.566) 8(-1.905,3.566)
  silkscreen extent -2.82,-3.33 2.68,2.3
XH2.54-4P [mm]
  rect 1.5x1.5 hole 0.9: 1(0,0)
  round 1.5 hole 0.9: 2(2.54,0) 3(5.08,0) 4(7.62,0)
  silkscreen extent -2.5,-2.67 10.12,3.03
XTAL3 [mm]
  oval 1.8x1.4 hole 0.711: 1(0,0) 2(5.08,0)
  silkscreen extent -4.06,-2.54 9.14,2.54
XTAL6 [mil]
  round 50 hole 25: 1(0,0) 2(96.06,0) 3(-36.09,191.39) 4(126.91,190.39)
  rect 50x80 smd: 5(47.91,314.39)
  silkscreen extent 9,20 89,340
YAMINGDIANZU [mm]
  round 2 hole 1.2: 1(-3.75,1.33) 2(3.75,-1.33)
  silkscreen extent -6.25,-2.1 6.25,2.1

## Part data
1 2: "品牌： Megastar(兆星)    型号： ZX-XH2.54-4PZZ    参考系列：XH 间距：2.54mm 插针结构：1x4P 排数：1 每排PIN数：4 公母：公型插针 安装方式：直插 额定电流：3A 触头材质：黄铜 触头镀层：锡 工作温度范围：-25℃~+85℃ 焊接温度(最大值)：260℃ 配套胶壳型号： ZX-XH2.54-4PJK 配套端子型号： ZX-XH2.54-DZ", LatestRevisionDate=17-Jul-2002, LatestRevisionNote="Re-released for DXP Platform.", Publisher="Altium Limited"
*1: library part stm32f103vct6
B1 B3: library part BRIDGE, "品牌： MDD  型号： KBP206  直流反向耐压(Vr)：600V 平均整流电流(Io)：2A 正向压降(Vf)：1.1V@2A 正向浪涌电流(Ifsm)：60A"
B2: library part BRIDGE, "品牌： MDD  型号： KBL406  直流反向耐压(Vr)：600V 平均整流电流(Io)：4A 正向压降(Vf)：1V@4A 正向浪涌电流(Ifsm)：125A"
C1 C2: library part CAP_3, "品牌： SAMSUNG(三星)  型号： CL21C100JCANNNC 容值：10pF 精度：±5% 额定电压：100V 材质(温度系数)：C0G C0G"
C3 C4: library part CAP_3, "品牌： SAMSUNG(三星)  型号： CL21C200JBANNNC     容值：20pF 精度：±5% 额定电压：50V 材质(温度系数)：C0G 材质:C0G"
C5: library part CAP_3, "品牌： SAMSUNG(三星)    型号： CL10B104KB8NNNC  容值：100nF 精度：±10% 额定电压：50V 材质(温度系数)：X7R 材质:X7R"
C6: library part CAP_3, "品牌： SAMSUNG(三星)  型号： CL21B105KBFNNNE  容值：1uF 精度：±10% 额定电压：50V 材质(温度系数)：X7R 材质:X7R"
C7: library part CAP_3, "品牌： SAMSUNG(三星)  型号： CL21B103KBANNNC  容值：10nF 精度：±10% 额定电压：50V 材质(温度系数)：X7R 材质:X7R"
C8: library part CAP
C9: library part Cap, "Capacitor"
C10: library part Cap, "品牌： SAMSUNG(三星) 型号： CL21B225KAFNNNE 容值：2.2uF 精度：±10% 额定电压：25V 材质(温度系数)：X7R 材质:X7R"
C11 C22 C23 C34_b1 C34_b2 C34_b3 C35_b1 C35_b2 C35_b3 C36_b1 C36_b2 C36_b3: library part Cap, "品牌： SAMSUNG(三星) 型号： CL21B104KBCNNNC ：容值：100nF 精度：±10% 额定电压：50V 材质(温度系数)：X7R 材质:X7R"
  C34_b1 C34_b2 C34_b3 C35_b1 C35_b2 C35_b3 C36_b1 C36_b2 C36_b3: LatestRevisionDate=17-Jul-2002, LatestRevisionNote="Re-released for DXP Platform.", PackageDescription="Radial Cap, Thru-Hole; 2 Leads; 0.3 in Pin Spacing", PackageReference=RAD-0.3, Published=8-Jun-2000, Publisher="Altium Limited"
C13 C16 C21: library part Cap, "品牌： SAMSUNG(三星)    型号： CL10B104KB8NNNC  容值：100nF 精度：±10% 额定电压：50V 材质(温度系数)：X7R 材质:X7R"
C14: library part CAP_3, "品牌： SAMSUNG(三星) 型号： CL21B104KBCNNNC ：容值：100nF 精度：±10% 额定电压：50V 材质(温度系数)：X7R 材质:X7R"
C15 C20: library part Cap, "品牌： muRata(村田) 型号： RCER72A683K1K1H03B  容值：68nF 精度：±10% 额定电压：100V 温度系数：X7R"
C17 C18: library part Cap, "品牌： muRata(村田) 品牌： muRata(村田)  容值：4.7nF 精度：±10% 额定电压：100V 温度系数：X7R"
C19 C27 C44: library part CAP, "Capacitor"
C24: library part Cap, "品牌： SAMSUNG(三星) 型号： CL21B334KBFNNNE 容值：330nF 精度：±10% 额定电压：50V 材质(温度系数)：X7R 材质:X7R"
C28 C29 C30 C31 C32 C37 C38 C39 C40 C41 C42: library part CAP, "品牌： SAMSUNG(三星) 型号： CL21B104KBCNNNC ：容值：100nF 精度：±10% 额定电压：50V 材质(温度系数)：X7R 材质:X7R"
C33_b1 C33_b2 C33_b3: library part Cap, "品牌： SAMSUNG(三星)   型号： CL21C101JBANNNC   容值：100pF 精度：±5% 额定电压：50V 材质(温度系数)：C0G 材质:C0G", LatestRevisionDate=17-Jul-2002, LatestRevisionNote="Re-released for DXP Platform.", PackageDescription="Radial Cap, Thru-Hole; 2 Leads; 0.3 in Pin Spacing", PackageReference=RAD-0.3, Published=8-Jun-2000, Publisher="Altium Limited"
C43 C45 C51: "Capacitor"
  C51: LatestRevisionDate=17-Jul-2002, LatestRevisionNote="Re-released for DXP Platform.", PackageDescription="Radial Cap, Thru-Hole; 2 Leads; 0.3 in Pin Spacing", PackageReference=RAD-0.3, Published=8-Jun-2000, Publisher="Altium Limited"
C47: library part CAP, "品牌： SHM(南方宏明) 型号： DCF101K26Y5PQ6BL7A0 等级：X1,Y2 容值：100pF 精度：±10% 电压(AC)：250V；400V 安规瓷介电容器 Y2 101 ±10% Y2 250VAC；100pF；±10%；Y5P；D=6.8max；CP线 0.55mm；引脚长20min.mm；直脚/直引线；引线间距7.5mm", Manufacturer="Generic Components", Class=Passive, Published=08/06/2000, Publisher="Altium Hobart Technology Centre", SubClass=Capacitor
CR1: library part BATTERY, "品牌： MYOUNG(美阳)  型号： BS-02-A1AJ010  连接器类型：电池底座 适用电池规格：CR2032 工作温度范围：-25℃~+85℃ 插脚 卧式底座 环保吸塑托盘包装"
D1 D2 D7: library part DIODE, "品牌： TWGMC(台湾迪嘉) 型号： 1N4001 极管配置：独立式 直流反向耐压(Vr)：50V 平均整流电流(Io)：1A 正向压降(Vf)：1.1V@1A 二极管配置：独立式 直流反向耐压(Vr)：50V 平均整流电流(Io)：1A 正向压降(Vf)：1.1V@1A"
D3: library part LED1, "品牌： 国星光电 型号： NCD0805B2 发光颜色：蓝灯 贴片LED；0805蓝色；2012蓝色；透镜颜色：无色透明；发光角度：130°；功率：72mW；工作温度：-30℃~+85℃；", Manufacturer="Generic Components", Class=Optoelectronic, Published=08/06/2000, Publisher="Altium Hobart Technology Centre", SubClass=LED
D6 D11_c1 D11_c2 D11_c3 D26_a1 D26_a2 D28_a1 D28_a2: "品牌： 国星光电 型号： NCD0805B2 发光颜色：蓝灯 贴片LED；0805蓝色；2012蓝色；透镜颜色：无色透明；发光角度：130°；功率：72mW；工作温度：-30℃~+85℃；", LatestRevisionDate=08-Jul-2005, LatestRevisionNote="Mech Layer 1 removed.", PackageDescription="LED; 2 Leads", PackageReference=LED-0, Published=8-Jun-2000, Publisher="Altium Limited"
D8 D9 D10: "品牌： 国星光电  型号： NCD0805G1  发光颜色：翠绿 贴片LED；0805翠绿；2012翠绿；透镜颜色：无色透明；发光角度：130°；功率：72mW；工作温度：-30℃~+85℃； 尺寸2.0*1.25*1.1；IF=5ma：2.5~3.6v，525~537.5nm,180~400mcd 金线，光强高，功耗低，可靠性好，寿命长", LatestRevisionDate=08-Jul-2005, LatestRevisionNote="Mech Layer 1 removed.", PackageDescription="LED; 2 Leads", PackageReference=LED-0, Published=8-Jun-2000, Publisher="Altium Limited"
D14: library part DIODE, "Diode"
D15: library part LED1, "Typical RED GaAs LED", Manufacturer="Generic Components", Class=Optoelectronic, Published=08/06/2000, Publisher="Altium Hobart Technology Centre", SubClass=LED
D16: library part "Diode 1N4004", "1 Amp General Purpose Rectifier", Code_JEDEC=DO-204-AL, ComponentLink1Description="Manufacturer Link", ComponentLink1URL=http://www.fairchildsemi.com/, ComponentLink2Description=Datasheet, ComponentLink2URL=http://www.fairchildsemi.com/ds/1N%2F1N4001.pdf, DatasheetVersion=1998, LatestRevisionDate=17-Jul-2002, LatestRevisionNote="Re-released for DXP Platform.", PackageDescription="Diode, Axial; Body 5.2 x 2.7 mm (LxDia. max), Lead Dia. 0.86 mm (max)", PackageReference=DO-41, PackageVersion=Aug-1999, Published=8-Jun-2000, Publisher="Altium Limited"
D23: "Typical INFRARED GaAs LED", LatestRevisionDate=08-Jul-2005, LatestRevisionNote="Mech Layer 1 removed.", PackageDescription="LED; 2 Leads", PackageReference=LED-0, Published=8-Jun-2000, Publisher="Altium Limited"
D25_a1 D25_a2 D27_a1 D27_a2: library part DIODE, "品牌： TWGMC(台湾迪嘉) 型号： 1N4007 二极管配置：独立式 直流反向耐压(Vr)：1kV 平均整流电流(Io)：1A 正向压降(Vf)：1.1V@1A 二极管配置：独立式 直流反向耐压(Vr)：1kV 平均整流电流(Io)：1A 正向压降(Vf)：1.1V@1A"
E1: library part ELECTRO1, "品牌： Kyocera AVX 型号： TAJB106K016RNJ ：容值：10uF 精度：±10% 额定电压：16V 等效串联电阻：2.8Ω@100kHz"
E2 E3: library part ELECTRO2, "品牌： Kyocera AVX 型号： TAJB107M010RNJ  容值：100uF 精度：±20% 额定电压：10V 等效串联电阻：1.4Ω@100kHz"
E4: library part ELECTRO1, "Electrolytic Capacitor"
E5 E6 E7 E9 E10 E11: library part ELECTRO1, "品牌： CX(承兴) 型号： KM108M025G17RR0VH2FP0 容值：1000uF 精度：±20% 额定电压：25V"
E8: library part ELECTRO1, "品牌： CX(承兴) 型号： KM228M050K30RR0VH2FP0 容值：2200uF 精度：±20% 额定电压：50V"
FM1: library part Speaker, "Loudspeaker"
IC1: library part MC78XX, "品牌： UMW(友台半导体)  型号： L7805CV  输出类型：固定 输出极性：正 最大输入电压：35V 输出电压：5V 输出电流：1.2A"
IC2: library part OPTOTRIAC, "品牌： LITEON(光宝)   型号： MOC3083     可控硅类型：双向可控硅 正向电压：1.2V 正向电流：50mA 断态峰值电压(Vdrm)：800V 静态dv/dt：1500V/us"
IC3: library part MC79XX, "品牌： ST(意法半导体) 封装： TO-220 输出类型：固定 输出极性：负 最大输入电压：35V 输出电压：5V 输出电流：1.5A 电源纹波抑制比(PSRR)：60dB@(120Hz) 薄片 5.0V"
IC4: library part TL431-SO8, "品牌： JSMSEMI(杰盛微) 型号： TL431输出类型：可调 输入电压：37V 输出电压：2.5V~36V"
IC5: library part SPX1117
IC8: "品牌： onsemi(安森美)  型号： CAT24C32WI-GT3  接口类型：I2C 存储容量：32Kbit EEPROM 串行 32-Kb I2C CAT24C32 是一款 32-kb I2C 串行 EEPROM 器件，内部组织为 4096 个词，每个词 8 位。它具有 32 字节页写入缓存，支持标准 (100 kHz)、快速 (400 kHz) 和超快 (1 MHz) I2C 协议。外部地址引脚使其能够在同一个总线上放置最多八"
IC9: library part TL072, "品牌： HGSEMI(华冠)   型号： LM2904M/TR"
IC10_b1 IC10_b2 IC10_b3: library part TL072_1, "品牌： TI(德州仪器)   型号： TL072IDR  放大器组数：2 增益带宽积(GBP)：5.25MHz 压摆率(SR)：13V/us 输入失调电压(Vos)：3mV 输入偏置电流(Ib)：65pA TL072 双路低噪声 JFET 输入通用运算放大器"
IC11: library part CDS0T23-SM712, "品牌： BOURNS     型号： CDSOT23-SM712   线路数：2 反向截止电压(Vrwm)：12V；7V 击穿电压(VBR)：13.3V；7.5V 钳位电压(Vc)@Ipp：26V；14V"
IC12: library part ULN2003
IC13: library part OPTOISO1, "Optoisolator"
K1_a1 K1_a2 K2_a1 K2_a2: library part Relay-G5NB-1A-E, "品牌： OMRON(欧姆龙) 型号： G5NB-1A-E DC12 封装： 插件,7x20.4mm", LatestRevisionDate=17-Jul-2002, LatestRevisionNote="Re-released for DXP Platform.", PackageReference=MODULE4, Published=24-Mar-1999, Publisher="Altium Limited"
L1 L2: library part INDUCTOR, "品牌： FH(风华)  型号： CMI201209X100KT  ：电感值：10uH 精度：±10% 额定电流：15mA 直流电阻(DCR)：1.15Ω"
L4: library part TRANS1, "UF16 22mH 1.5A 12.5*10"